# EAGLE board MSP430F2272IDA breakout (EAGLE 5.06)
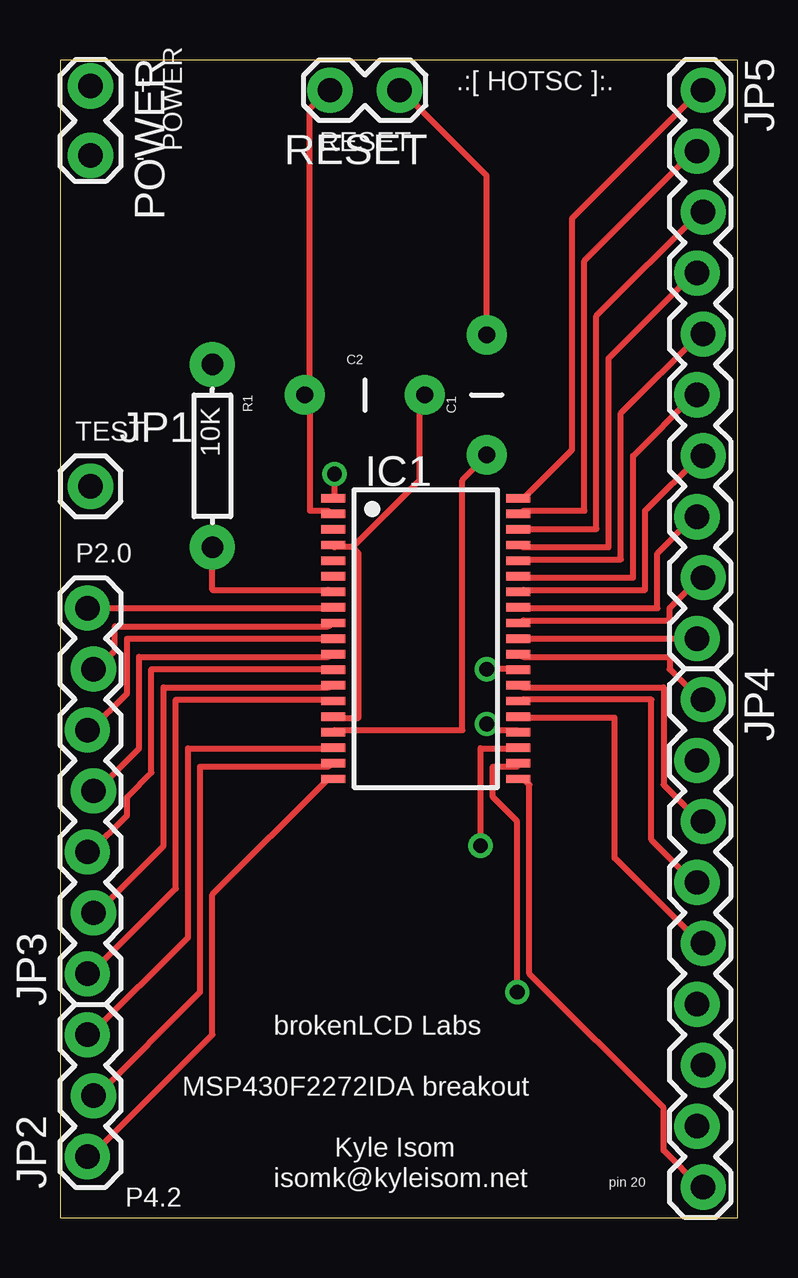
[diagram p0: board, top side]
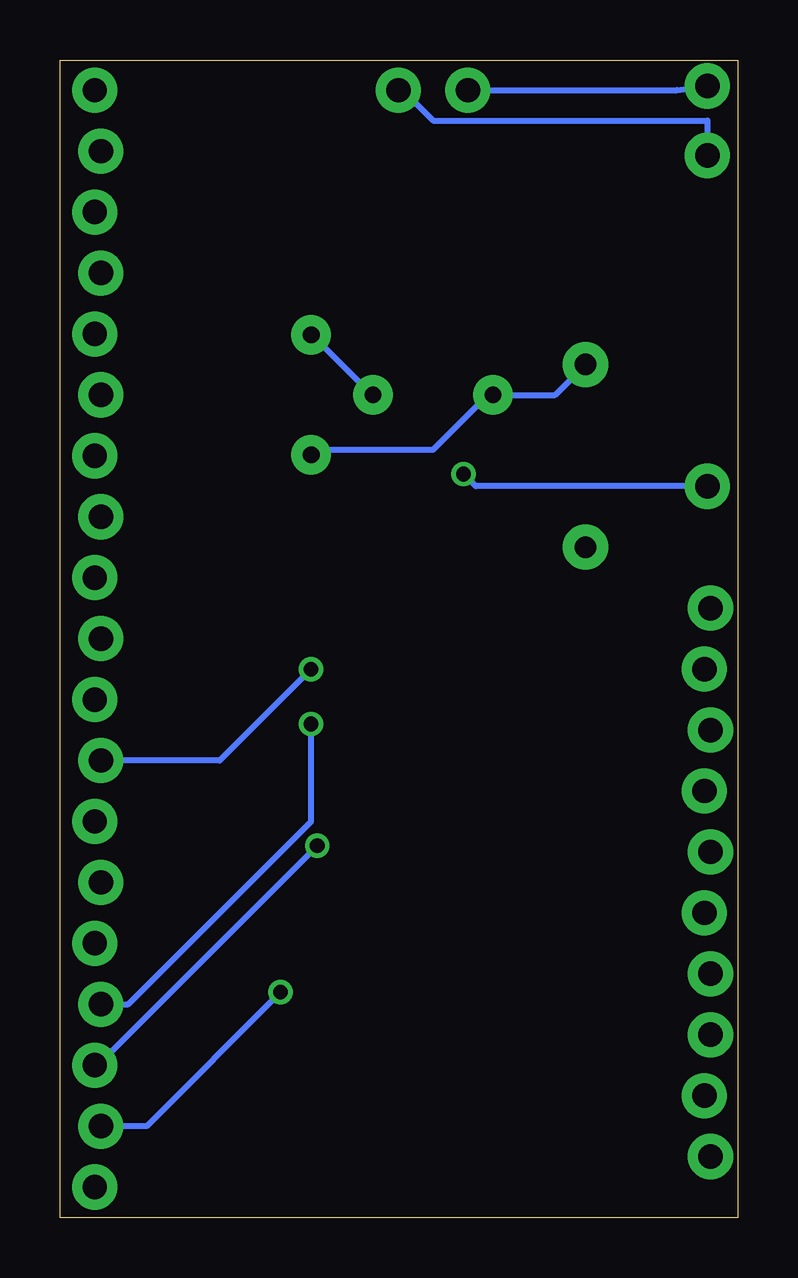
[diagram p1: board, bottom side, seen from below]

Size 28.25 x 48.25 mm. Coordinates in mm from the lower left corner, seen from the top.
Outline: 0,0 28.25,0 28.25,48.25 0,48.25 0,0
Copper layers (1*16): Top 0.035mm / dielectric 1.5mm / Bottom 0.035mm
Design rules "default": minimum track width 10mil, minimum drill 24mil, track to track 8mil, track to pad 8mil, pad to pad 8mil, via to via 8mil, smd to smd 8mil, copper to edge 40mil, drill to drill 8mil, minimum pad ring 10mil, minimum via ring 8mil, stop-mask expansion 4mil, vias tented up to drill 0mil, thermal gap 10mil

## Footprints (pad centres in the part's own frame; a part is rotated, then mirrored left to right if it is on the bottom)
CAP-PTH-5MM = drill 0.7 pad 1.651 round: 1 -2.5,0; 2 2.5,0
TSSOP38_R-PDSO-G38-DA = smd 0.35 x 1: 1 -5.85,-3.85; 2 -5.2,-3.85; 3 -4.55,-3.85; 4 -3.9,-3.85; 5 -3.25,-3.85; 6 -2.6,-3.85; 7 -1.95,-3.85; 8 -1.3,-3.85; 9 -0.65,-3.85; 10 0,-3.85; 11 0.65,-3.85; 12 1.3,-3.85; 13 1.95,-3.85; 14 2.6,-3.85; 15 3.25,-3.85; 16 3.9,-3.85; 17 4.55,-3.85; 18 5.2,-3.85; 19 5.85,-3.85; 20 5.85,3.85; 21 5.2,3.85; 22 4.55,3.85; 23 3.9,3.85; 24 3.25,3.85; 25 2.6,3.85; 26 1.95,3.85; 27 1.3,3.85; 28 0.65,3.85; 29 0,3.85; 30 -0.65,3.85; 31 -1.3,3.85; 32 -1.95,3.85; 33 -2.6,3.85; 34 -3.25,3.85; 35 -3.9,3.85; 36 -4.55,3.85; 37 -5.2,3.85; 38 -5.85,3.85
1X01 = drill 1.016 pad 1.88 round: 1 0,0
1X03_LOCK = drill 1.016 pad 1.88 round: 1 0,0.127; 2 2.54,-0.127; 3 5.08,0.127
1X07_LOCK = drill 1.016 pad 1.88 round: 1 0,0.127; 2 2.54,-0.127; 3 5.08,0.127; 4 7.62,-0.127; 5 10.16,0.127; 6 12.7,-0.127; 7 15.24,0.127
1X09_LOCK = drill 1.016 pad 1.88 round: 1 0,0.127; 2 2.54,-0.127; 3 5.08,0.127; 4 7.62,-0.127; 5 10.16,0.127; 6 12.7,-0.127; 7 15.24,0.127; 8 17.78,-0.127; 9 20.32,0.127
1X10_LOCK = drill 1.016 pad 1.88 round: 1 0,0.127; 2 2.54,-0.127; 3 5.08,0.127; 4 7.62,-0.127; 5 10.16,0.127; 6 12.7,-0.127; 7 15.24,0.127; 8 17.78,-0.127; 9 20.32,0.127; 10 22.86,-0.127
1X02_LOCK = drill 1.016 pad 1.88 round: 1 -0.178,0; 2 2.718,0
AXIAL-0.3 = drill 0.9 pad 1.88 round: P$1 -3.81,0; P$2 3.81,0

## Placement (x,y rotation side)
C1  0.1uF  [CAP-PTH-5MM]  17.78,34.29 90 top
C2  0.1uF  [CAP-PTH-5MM]  12.7,34.29 0 top
IC1  MSP430F2272IDA  [TSSOP38_R-PDSO-G38-DA]  15.24,24.13 270 top
JP1  M01PTH  [1X01]  1.27,30.48 0 top
JP2  [1X03_LOCK]  1.27,2.54 90 top
JP3  [1X07_LOCK]  1.27,10.16 90 top
JP4  M09LOCK  [1X09_LOCK]  26.67,21.59 270 top
JP5  M10LOCK  [1X10_LOCK]  26.67,46.99 270 top
POWER  [1X02_LOCK]  1.27,46.99 270 top
R1  10K  [AXIAL-0.3]  6.35,31.75 270 top
RESET  [1X02_LOCK]  13.97,46.99 180 top

## Library data of the parts
C1 C2 JP1-JP5 POWER R1 RESET = SparkFun
IC1 = texas

## Nets
GND: C1.2 C2.2 IC1.4 IC1.15 POWER.2 RESET.1
N$1: IC1.19 JP2.1
N$2: IC1.18 JP2.2
N$3: IC1.17 JP2.3
N$4: IC1.7 R1.P$2
N$5: IC1.14 JP3.1
N$6: IC1.13 JP3.2
N$7: IC1.12 JP3.3
N$8: IC1.11 JP3.4
N$9: IC1.10 JP3.5
N$10: IC1.9 JP3.6
N$11: IC1.8 JP3.7
N$12: IC1.28 JP4.1
N$13: IC1.27 JP4.2
N$14: IC1.26 JP4.3
N$15: IC1.25 JP4.4
N$16: IC1.24 JP4.5
N$17: IC1.23 JP4.6
N$18: IC1.22 JP4.7
N$19: IC1.21 JP4.8
N$20: IC1.20 JP4.9
N$21: IC1.38 JP5.1
N$22: IC1.37 JP5.2
N$23: IC1.36 JP5.3
N$24: IC1.35 JP5.4
N$25: IC1.34 JP5.5
N$26: IC1.33 JP5.6
N$27: IC1.32 JP5.7
N$28: IC1.31 JP5.8
N$29: IC1.30 JP5.9
N$30: IC1.29 JP5.10
N$31: IC1.1 JP1.1
VCC: C1.1 C2.1 IC1.2 IC1.16 POWER.1 R1.P$1 RESET.2

## Tracks (layer width: path | path; a pad name or v marks a point on that pad's centre or on a via)
GND
  Top 0.254: 12.19,27.94 12.45,27.69 12.45,20.83 11.43,20.83 IC1.15 | 12.19,27.94 11.43,27.94 IC1.4 | 12.19,27.94 14.99,30.73 14.99,34.29 C2.2 | RESET.1 14.22,46.99 17.78,43.43 C1.2
  Bottom 0.254: POWER.2 1.27,45.72 12.7,45.72 13.97,46.99 RESET.1 | C2.2 15.24,34.29 17.53,36.58 17.78,36.58 C1.2
N$1
  Top 0.254: IC1.19 11.18,18.29 6.35,13.46 6.35,7.62 1.27,2.54 JP2.1
N$2
  Top 0.254: IC1.18 11.18,18.8 5.84,18.8 5.84,9.4 1.52,5.08 JP2.2
N$3
  Top 0.254: IC1.17 11.18,19.56 5.33,19.56 5.33,11.68 1.27,7.62 JP2.3
N$4
  Top 0.254: R1.P$2 6.35,26.16 11.18,26.16 IC1.7
N$5
  Top 0.254: IC1.14 11.18,21.59 4.83,21.59 4.83,13.72 1.27,10.16 JP3.1
N$6
  Top 0.254: IC1.13 11.18,22.1 4.32,22.1 4.32,15.49 1.52,12.7 JP3.2
N$7
  Top 0.254: IC1.12 11.18,22.86 3.81,22.86 3.81,18.54 2.79,17.53 2.79,16.76 1.27,15.24 JP3.3
N$8
  Top 0.254: IC1.11 11.18,23.37 3.3,23.37 3.3,19.56 1.52,17.78 JP3.4
N$9
  Top 0.254: IC1.10 2.79,24.13 2.79,21.84 1.27,20.32 JP3.5
N$10
  Top 0.254: IC1.9 11.18,24.64 2.29,24.64 2.29,23.62 1.52,22.86 JP3.6
N$11
  Top 0.254: IC1.8 11.18,25.4 JP3.7
N$12
  Top 0.254: IC1.28 19.3,23.37 25.4,23.37 25.4,22.86 26.67,21.59 JP4.1
N$13  (via drill 0.61)
  Top 0.254: v17.78,22.86 19.05,22.86 IC1.27
  Bottom 0.254: v17.78,22.86 21.59,19.05 JP4.2
N$14
  Top 0.254: IC1.26 19.3,22.1 25.15,22.1 25.15,18.03 26.67,16.51 JP4.3
N$15
  Top 0.254: IC1.25 19.3,21.59 24.64,21.59 24.64,15.75 26.42,13.97 JP4.4
N$16
  Top 0.254: IC1.24 19.3,20.83 23.11,20.83 23.11,14.99 26.67,11.43 JP4.5
N$17  (via drill 0.61)
  Top 0.254: v17.78,20.57 17.78,20.32 19.05,20.32 IC1.23
  Bottom 0.254: v17.78,20.57 17.78,16.51 25.4,8.89 JP4.6
N$18  (via drill 0.61)
  Top 0.254: v17.53,15.49 17.53,19.56 19.05,19.56 IC1.22
  Bottom 0.254: v17.53,15.49 26.67,6.35 JP4.7
N$19  (via drill 0.61)
  Top 0.254: v19.05,9.4 19.05,16.51 18.03,17.53 18.03,18.8 19.05,18.8 IC1.21
  Bottom 0.254: v19.05,9.4 24.64,3.81 JP4.8
N$20
  Top 0.254: IC1.20 19.3,18.29 19.56,18.03 19.56,10.16 25.15,4.57 25.15,2.79 26.67,1.27 JP4.9
N$21
  Top 0.254: IC1.38 19.3,29.97 21.34,32 21.34,41.66 26.67,46.99 JP5.1
N$22
  Top 0.254: IC1.37 19.3,29.46 21.84,29.46 21.84,39.88 26.42,44.45 JP5.2
N$23
  Top 0.254: IC1.36 19.3,28.7 22.35,28.7 22.35,37.59 26.67,41.91 JP5.3
N$24
  Top 0.254: IC1.35 19.3,27.94 22.86,27.94 22.86,35.81 26.42,39.37 JP5.4
N$25
  Top 0.254: IC1.34 19.3,27.43 23.37,27.43 23.37,33.53 26.67,36.83 JP5.5
N$26
  Top 0.254: IC1.33 19.3,26.67 23.88,26.67 23.88,31.75 26.42,34.29 JP5.6
N$27
  Top 0.254: IC1.32 19.3,26.16 24.38,26.16 24.38,29.46 26.67,31.75 JP5.7
N$28
  Top 0.254: IC1.31 19.3,25.4 24.89,25.4 24.89,27.69 26.42,29.21 JP5.8
N$29
  Top 0.254: IC1.30 19.3,24.89 25.4,24.89 25.4,25.4 26.67,26.67 JP5.9
N$30
  Top 0.254: IC1.29 JP5.10
N$31  (via drill 0.61)
  Top 0.254: v11.43,30.99 11.43,29.97 IC1.1
  Bottom 0.254: v11.43,30.99 10.92,30.48 JP1.1
VCC
  Top 0.254: 10.41,34.29 10.41,29.46 11.18,29.46 IC1.2 | IC1.16 11.43,20.32 16.76,20.32 16.76,30.73 17.78,31.75 C1.1 | 10.41,34.29 10.41,46.23 11.18,46.99 RESET.2 | C2.1 10.41,34.29
  Bottom 0.254: RESET.2 2.54,46.99 POWER.1 | R1.P$1 7.62,34.29 C2.1 10.41,34.29 12.7,32 17.78,32 C1.1

## Text on the board
tPlace: + | .:[ HOTSC ]:. | - | POWER | RESET | TEST | P2.0 | brokenLCD Labs | MSP430F2272IDA breakout | Kyle Isom | P4.2 | isomk@kyleisom.net | pin 20